# Altium PCB PowerBoard.PcbDoc (part 3 of 3)
Units mm, origin at the board's own origin, x right, y up, seen from the top; angles counter-clockwise.
Board outline 222.5 x 110 mm, 4 copper layers (Top Layer, Internal Plane 2, Internal Plane 1, Bottom Layer); 330 components, 249 nets, 1088 pads, 487 vias.
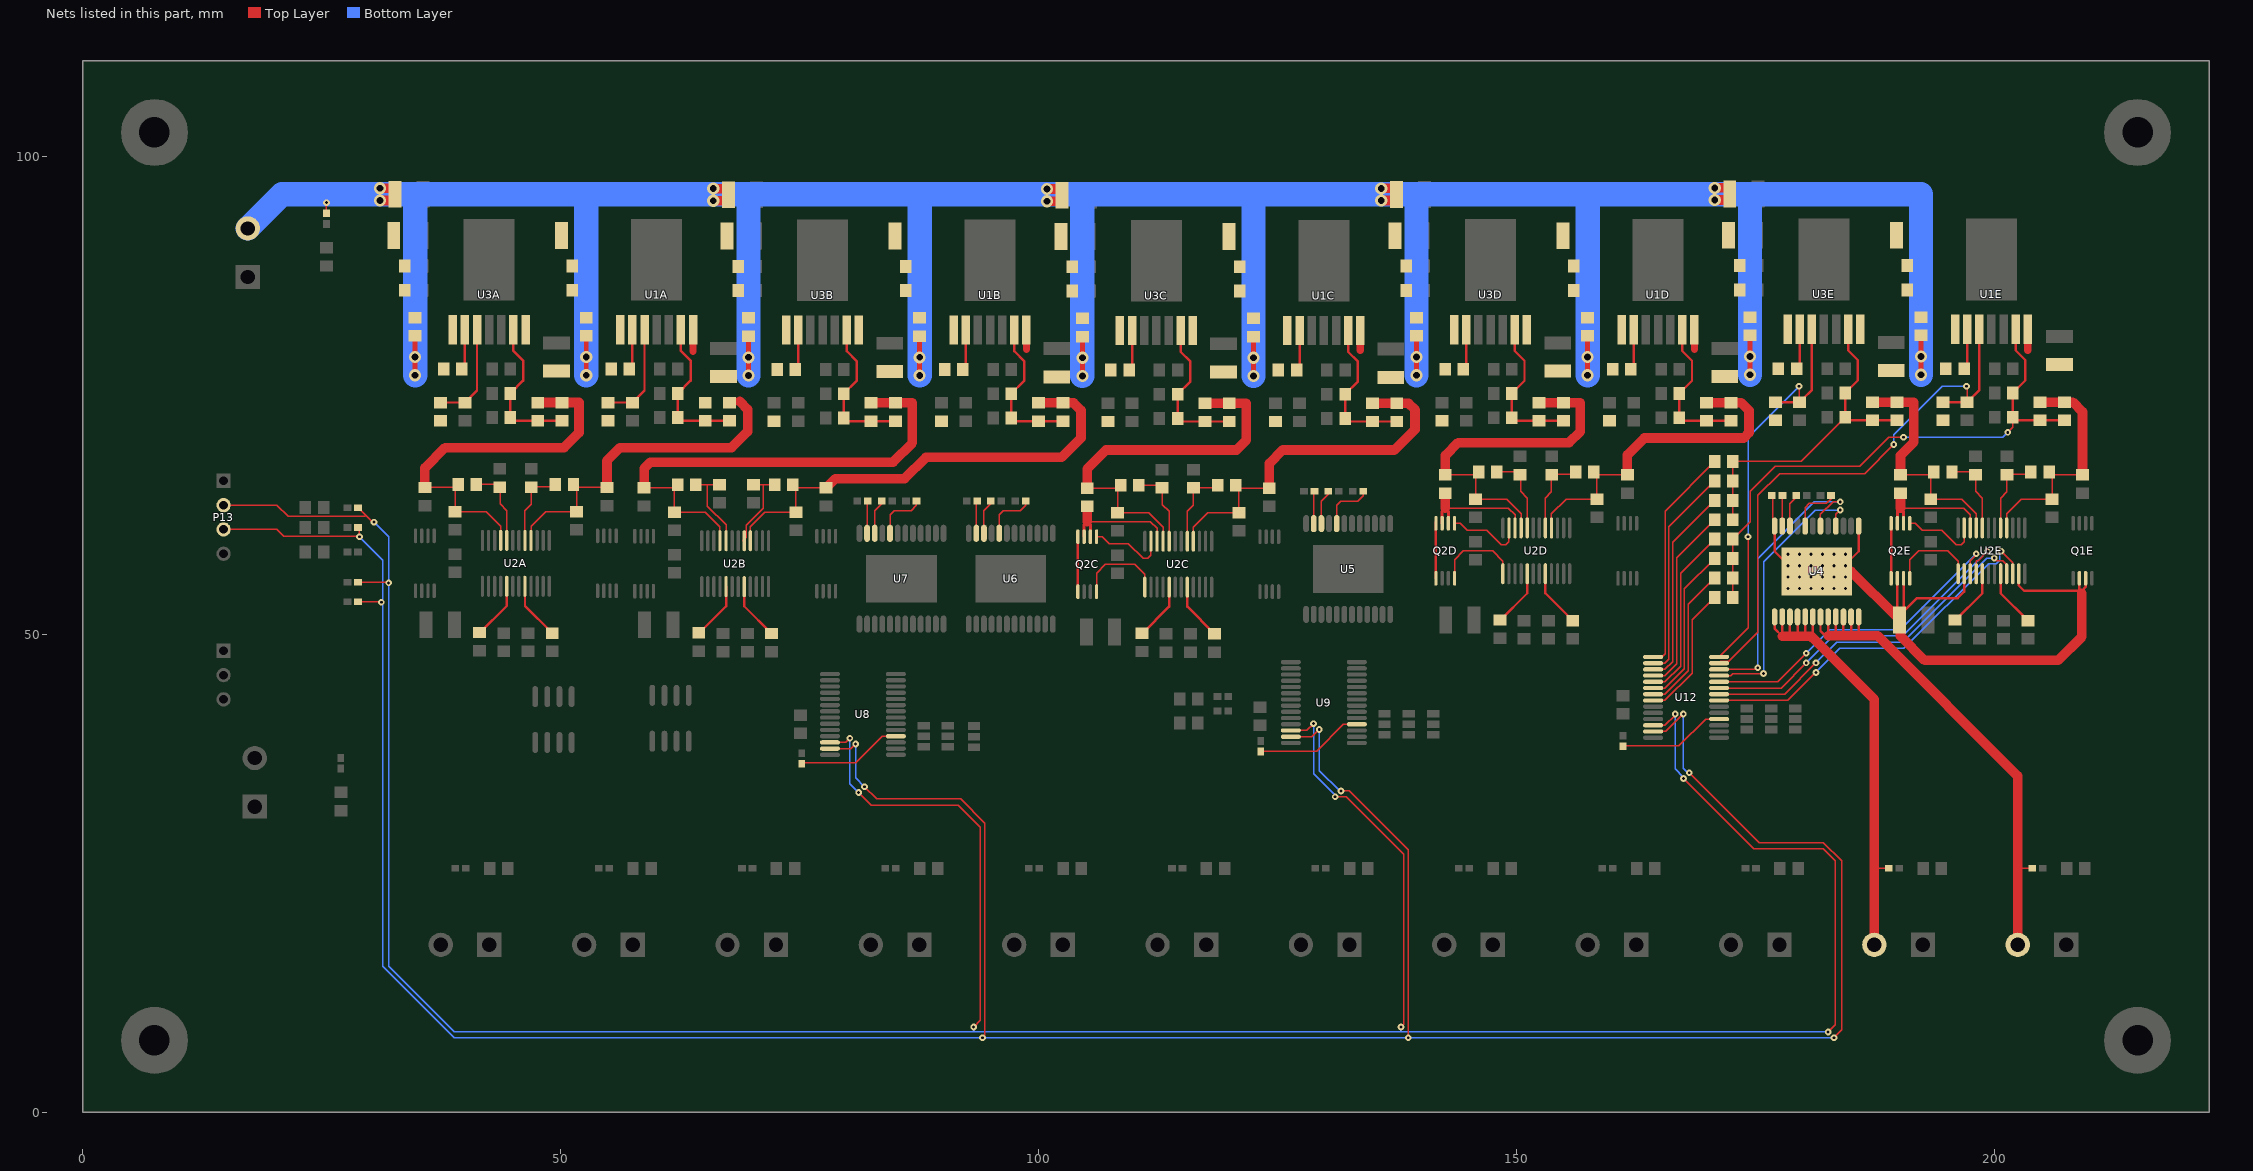
[diagram p5: the nets of this part, all layers, seen from the top]

## Via types
v1: diameter 0.7, hole 0.3, Top Layer to Bottom Layer, tented both sides, 231 vias
v2: diameter 0.7, hole 0.3, Top Layer to Bottom Layer, tented bottom, 120 vias
v3: diameter 0.66, hole 0.33, Top Layer to Bottom Layer, tented both sides, 96 vias
v4: diameter 1.27, hole 0.711, Top Layer to Bottom Layer, tented both sides, 40 vias

## Nets (pads, with @x,y where several pads share a name; then routed paths per layer and width w, separated by ;. In a path a pad name is that pad's centre, name@x,y a point inside that pad or via, vN(x,y) a via of type N, cw(c..) or ccw(c..) an arc to the next point about the centre after c; other vN are vias at no path point) (continued)
NetQ2C_D1: Q2C.D1 Q2C.D2 | length 5.9
  Top Layer w0.254: Q2C.D1@104.124,54.453 Q2C.D2@104.124,60.33
NetQ2C_G1: Q2C.G1 U2C.13 | length 9.2
  Top Layer w0.152: Q2C.G1@106.074,54.453 106.074,56.398 107.004,57.328 110.052,57.328 111.132,56.249 U2C.13@111.132,54.928
NetQ2C_G2: Q2C.G2 U2C.11 | length 8.2
  Top Layer w0.152: Q2C.G2@106.074,60.203 106.669,60.203 107.385,59.487 109.417,59.487 110.941,57.963 111.449,57.963 111.767,58.281 U2C.11@111.767,59.728
NetQ2C_S2: Q2C.S2 R12C.2 U2C.10 | length 13.9
  Top Layer w0.152: 105.099,61.773 111.703,61.773 112.402,61.075 U2C.10@112.402,59.728
  Top Layer w0.305: Q2C.S2@104.774,60.203 104.774,61.448 105.099,61.773 105.424,61.448 Q2C.S2@105.424,60.203
  Top Layer w1.016: 105.099,61.773 R12C.2@105.099,63.363
NetQ2D_D1: Q2D.D1 Q2D.D2 | length 5.9
  Top Layer w0.254: Q2D.D1@141.587,55.85 Q2D.D2@141.587,61.727
NetQ2D_G1: Q2D.G1 U2D.13 | length 9.2
  Top Layer w0.152: Q2D.G1@143.537,55.85 143.537,57.795 144.467,58.725 147.515,58.725 148.595,57.646 U2D.13@148.594,56.325
NetQ2D_G2: Q2D.G2 U2D.11 | length 8.2
  Top Layer w0.152: Q2D.G2@143.537,61.6 144.132,61.6 144.848,60.884 146.88,60.884 148.404,59.36 148.912,59.36 149.23,59.678 U2D.11@149.229,61.125
NetQ2D_S2: Q2D.S2 R12D.2 U2D.10 | length 13.9
  Top Layer w0.152: 142.562,63.17 149.166,63.17 149.864,62.471 U2D.10@149.864,61.125
  Top Layer w0.305: Q2D.S2@142.237,61.6 142.237,62.845 142.562,63.17 142.887,62.845 Q2D.S2@142.887,61.6
  Top Layer w1.016: 142.562,63.17 R12D.2@142.562,64.76
NetQ2E_D1: Q2E.D1 Q2E.D2 | length 5.9
  Top Layer w0.254: Q2E.D1@189.214,55.85 Q2E.D2@189.214,61.727
NetQ2E_G1: Q2E.G1 U2E.13 | length 9.2
  Top Layer w0.152: Q2E.G1@191.164,55.85 191.164,57.795 192.094,58.725 195.142,58.725 196.222,57.646 U2E.13@196.222,56.325
NetQ2E_G2: Q2E.G2 U2E.11 | length 8.2
  Top Layer w0.152: Q2E.G2@191.164,61.6 191.759,61.6 192.475,60.884 194.507,60.884 196.031,59.36 196.539,59.36 196.857,59.678 U2E.11@196.857,61.125
NetQ2E_S2: Q2E.S2 R12E.2 U2E.10 | length 13.9
  Top Layer w0.152: 190.189,63.17 196.793,63.17 197.492,62.472 U2E.10@197.492,61.125
  Top Layer w0.305: Q2E.S2@189.864,61.6 189.864,62.845 190.189,63.17 190.514,62.845 Q2E.S2@190.514,61.6
  Top Layer w1.016: 190.189,63.17 R12E.2@190.189,64.76
NetR2A_2: R2A.2 R3A.2 U2A.5 | length 8
  Top Layer w0.152: U2A.5@46.271,59.815 46.271,62.939 46.903,63.572 46.903,65.416 R2A.2@49.067,65.416
NetR2B_2: R2B.2 R3B.2 U2B.5 | length 9.2
  Top Layer w0.152: U2B.5@69.216,59.777 69.075,59.777 69.447,60.149 69.447,61.421 71.076,63.049 71.076,63.058 71.188,63.17 71.188,65.632 ; R3B.2@70.172,65.476 R3B.2@70.172,65.644 ; R3B.2@70.184,65.632 71.188,65.632 ; R2B.2@72.393,65.632 71.188,65.632
NetR2C_2: R2C.2 R3C.2 U2C.5 | length 8
  Top Layer w0.152: U2C.5@115.577,59.728 115.577,62.853 116.209,63.485 116.209,65.329 R2C.2@118.373,65.329
NetR2D_2: R2D.2 R3D.2 U2D.5 | length 8
  Top Layer w0.152: U2D.5@153.039,61.125 153.039,64.249 153.672,64.882 153.672,66.726 R2D.2@155.836,66.726
NetR2E_2: R2E.2 R3E.2 U2E.5 | length 8
  Top Layer w0.152: U2E.5@200.667,61.125 200.667,64.25 201.299,64.882 201.299,66.726 R2E.2@203.463,66.726
NetR4A_1: R4A.1 U1A.2 | length 4.3
  Top Layer w0.254: R4A.1@57.19,77.735 57.51,78.055 U1A.2@57.51,81.86
NetR4B_1: R4B.1 U1B.2 | length 4.3
  Top Layer w0.254: R4B.1@92.073,77.697 92.393,78.017 U1B.2@92.393,81.822
NetR4C_1: R4C.1 U1C.2 | length 4.3
  Top Layer w0.254: R4C.1@127.004,77.648 127.324,77.968 U1C.2@127.324,81.773
NetR4D_1: R4D.1 U1D.2 | length 4.3
  Top Layer w0.254: R4D.1@161.964,77.726 162.284,78.046 U1D.2@162.284,81.851
NetR4E_1: R4E.1 U1E.2 | length 4.3
  Top Layer w0.254: R4E.1@196.854,77.775 197.174,78.095 U1E.2@197.174,81.9
NetR10A_2: R10A.2 R11A.2 U2A.8 | length 8.1
  Top Layer w0.152: R11A.2@41.569,65.67 43.479,65.67 43.667,65.482 43.667,63.638 44.366,62.939 U2A.8@44.366,59.815
NetR10B_2: R10B.2 R11B.2 U2B.8 | length 9
  Top Layer w0.152: R11B.2@64.514,65.632 65.346,65.632 ; R10B.2@66.612,65.444 66.424,65.632 65.346,65.632 ; R10B.2@66.612,65.476 R10B.2@66.612,65.644 ; U2B.8@67.311,59.777 67.311,61.447 65.346,63.412 65.346,65.632
NetR10C_2: R10C.2 R11C.2 U2C.8 | length 8.1
  Top Layer w0.152: R11C.2@110.875,65.583 112.785,65.583 112.973,65.395 112.973,63.551 113.672,62.853 U2C.8@113.672,59.728
NetR10D_2: R10D.2 R11D.2 U2D.8 | length 8.1
  Top Layer w0.152: R11D.2@148.338,66.98 150.248,66.98 150.436,66.792 150.436,64.948 151.134,64.249 U2D.8@151.134,61.125
NetR10E_2: R10E.2 R11E.2 U2E.8 | length 8.1
  Top Layer w0.152: R11E.2@195.965,66.98 197.875,66.98 198.063,66.792 198.063,64.948 198.762,64.25 U2E.8@198.762,61.125
NetR13A_1: R13A.1 U3A.2 | length 4.4
  Top Layer w0.254: R13A.1@39.664,77.735 39.984,77.735 U3A.2@39.984,81.86
NetR13B_1: R13B.1 U3B.2 | length 4.4
  Top Layer w0.254: R13B.1@74.547,77.697 74.867,77.697 U3B.2@74.867,81.822
NetR13C_1: R13C.1 U3C.2 | length 4.4
  Top Layer w0.254: R13C.1@109.478,77.648 109.798,77.648 U3C.2@109.798,81.773
NetR13D_1: R13D.1 U3D.2 | length 4.4
  Top Layer w0.254: R13D.1@144.438,77.726 144.758,77.726 U3D.2@144.758,81.851
NetR13E_1: R13E.1 U3E.2 | length 4.4
  Top Layer w0.254: R13E.1@179.328,77.775 179.648,77.775 U3E.2@179.648,81.9
NetR19_2: R19.2 U4.CS_DIS | length 3.3
  Top Layer w0.152: U4.CS_DIS@177.824,61.316 R19.2@177.824,64.608
NetR20_2: R20.2 U5.CS_DIS | length 3.3
  Top Layer w0.152: U5.CS_DIS@128.802,61.57 R20.2@128.802,64.862
NetR21_1: R21.1 U4.CS2 | length 3.7
  Top Layer w0.152: U4.CS2@178.624,61.316 178.624,63.672 179.35,64.398 R21.1@179.35,64.694
NetR22_1: R22.1 U4.CS1 | length 5.6
  Top Layer w0.152: U4.CS1@180.224,61.316 180.224,63.24 180.662,63.678 182.44,63.678 182.99,64.228 R22.1@182.99,64.694
NetR23_1: R23.1 U5.CS2 | length 3.7
  Top Layer w0.152: U5.CS2@129.602,61.57 129.602,63.926 130.328,64.652 R23.1@130.328,64.948
NetR24_1: R24.1 U5.CS1 | length 5.6
  Top Layer w0.152: U5.CS1@131.202,61.57 131.202,63.494 131.64,63.932 133.418,63.932 133.968,64.482 R24.1@133.968,64.948
NetR25_2: R25.2 U6.CS_DIS | length 3.3
  Top Layer w0.152: U6.CS_DIS@93.496,60.554 R25.2@93.496,63.846
NetR26_2: R26.2 U7.CS_DIS | length 3.3
  Top Layer w0.152: U7.CS_DIS@82.066,60.554 R26.2@82.066,63.846
NetR27_1: R27.1 U6.CS2 | length 3.7
  Top Layer w0.152: U6.CS2@94.296,60.554 94.296,62.91 95.022,63.636 R27.1@95.022,63.932
NetR28_1: R28.1 U6.CS1 | length 5.6
  Top Layer w0.152: U6.CS1@95.896,60.554 95.896,62.478 96.334,62.916 98.112,62.916 98.662,63.466 R28.1@98.662,63.932
NetR29_1: R29.1 U7.CS2 | length 3.7
  Top Layer w0.152: U7.CS2@82.866,60.554 82.866,62.91 83.592,63.636 R29.1@83.592,63.932
NetR30_1: R30.1 U7.CS1 | length 5.6
  Top Layer w0.152: U7.CS1@84.466,60.554 84.466,62.478 84.904,62.916 86.682,62.916 87.232,63.466 R30.1@87.232,63.932
NetR31_2: R31.2 U8.18 | length 11.2
  Top Layer w0.152: R31.2@75.022,36.482 75.064,36.524 80.864,36.524 83.669,39.329 U8.18@85.076,39.329
NetR32_2: R32.2 U9.18 | length 11.2
  Top Layer w0.152: R32.2@123.252,37.728 123.294,37.77 129.094,37.77 131.899,40.575 U9.18@133.306,40.575
NetR35_1: R35.1 U12.7 | length 15.6
  Top Layer w0.152: U12.7@164.312,43.719 165.552,43.719 167.996,46.163 167.996,53.122 R35.1@170.754,55.88
NetR36_1: R36.1 U12.8 | length 14.2
  Top Layer w0.152: U12.8@164.312,43.069 165.552,43.069 168.402,45.919 168.402,50.52 168.402,51.496 R36.1@170.754,53.848
NetR37_1: R37.1 U12.6 | length 16.9
  Top Layer w0.152: U12.6@164.312,44.369 165.552,44.369 167.589,46.406 167.589,54.747 R37.1@170.754,57.912
NetR38_1: R38.1 U12.5 | length 18.3
  Top Layer w0.152: U12.5@164.312,45.019 165.552,45.019 167.183,46.65 167.183,56.373 R38.1@170.754,59.944
NetR39_1: R39.1 U12.4 | length 19.7
  Top Layer w0.152: U12.4@164.312,45.669 165.552,45.669 166.776,46.893 166.776,57.998 R39.1@170.754,61.976
NetR40_1: R40.1 U12.3 | length 21.1
  Top Layer w0.152: U12.3@164.312,46.319 165.552,46.319 166.37,47.137 166.37,59.624 R40.1@170.754,64.008
NetR41_1: R41.1 U12.2 | length 22.5
  Top Layer w0.152: U12.2@164.312,46.969 165.552,46.969 165.964,47.381 165.964,61.25 R41.1@170.754,66.04
NetR42_1: R42.1 U12.1 | length 23.7
  Top Layer w0.152: U12.1@164.312,47.619 165.246,47.619 165.557,47.93 165.557,62.441 165.557,62.875 R42.1@170.754,68.072
NetR43_2: R43.2 U12.18 | length 11.2
  Top Layer w0.152: R43.2@161.158,38.272 161.2,38.314 167,38.314 169.805,41.119 U12.18@171.212,41.119
NetR44A_1: R44A.1 U2A.20 | length 6.1
  Top Layer w0.254: U2A.20@46.271,55.015 46.271,52.968 R44A.1@49.128,50.11
NetR44B_1: R44B.1 U2B.20 | length 6.1
  Top Layer w0.254: U2B.20@69.216,54.977 69.216,52.93 R44B.1@72.073,50.072
NetR44C_1: R44C.1 U2C.20 | length 6.1
  Top Layer w0.254: U2C.20@115.577,54.928 115.577,52.881 R44C.1@118.434,50.023
NetR44D_1: R44D.1 U2D.20 | length 6.1
  Top Layer w0.254: U2D.20@153.039,56.325 153.04,54.278 R44D.1@155.897,51.42
NetR44E_1: R44E.1 U2E.20 | length 6.1
  Top Layer w0.254: U2E.20@200.667,56.325 200.667,54.278 R44E.1@203.524,51.42
NetR45A_1: R45A.1 U2A.17 | length 6.1
  Top Layer w0.254: R45A.1@41.508,50.11 44.366,52.968 U2A.17@44.366,55.015
NetR45B_1: R45B.1 U2B.17 | length 6.1
  Top Layer w0.254: R45B.1@64.453,50.072 67.311,52.93 U2B.17@67.311,54.977
NetR45C_1: R45C.1 U2C.17 | length 6.1
  Top Layer w0.254: R45C.1@110.814,50.023 113.672,52.881 U2C.17@113.672,54.928
NetR45D_1: R45D.1 U2D.17 | length 6.1
  Top Layer w0.254: R45D.1@148.277,51.42 151.134,54.277 U2D.17@151.134,56.325
NetR45E_1: R45E.1 U2E.17 | length 6.1
  Top Layer w0.254: R45E.1@195.904,51.42 198.762,54.278 U2E.17@198.762,56.325
PWR_SCL: P13.2 R62.2 R64.1 U8.12 U9.12 U12.12 | length 353.2
  Top Layer w0.152: P13.2@14.732,63.5 20.32,63.5 21.482,62.338 29.576,62.338 ; R62.2@28.795,55.423 31.953,55.423 v1(32.004,55.372) ; R64.1@28.8,63.242 v1@30.48,61.562 ; U8.12@78.176,38.679 79.827,38.679 v1(80.264,39.116) ; v1(81.185,33.433) 82.503,32.116 91.582,32.116 93.924,29.774 93.924,9.596 v1(93.218,8.89) ; U9.12@126.406,39.925 128.063,39.925 v1(128.778,40.64) ; v1(131.041,32.997) 132.2,32.997 138.224,26.972 138.224,9.192 v1(137.922,8.89) ; U12.12@164.312,40.469 165.552,40.469 166.624,41.541 v1(166.624,41.656) ; v1(167.49,34.902) 174.848,27.544 182.118,27.544 183.388,26.274 183.388,9.144 v1(182.626,8.382)
  Bottom Layer w0.152: v1@30.607,61.849 30.607,61.595 32.004,60.198 32.004,15.24 38.862,8.382 93.218,8.382 ; v1(80.264,39.116) 80.264,34.355 v1(81.185,33.433) ; v1(93.218,8.89) 93.218,8.382 ; v1(128.778,40.64) 128.778,35.403 131.041,33.14 v1(131.041,32.997) ; v1(137.922,8.89) 137.922,8.382 ; v1(166.624,41.656) 166.624,35.911 167.49,35.045 v1(167.49,34.902) ; v1(182.626,8.382) 137.922,8.382 ; 93.218,8.382 137.922,8.382
  other v1: 30.48,61.722
PWR_SDA: P13.3 R61.2 R63.1 U8.13 U9.13 U12.13 | length 352.4
  Top Layer w0.152: P13.3@14.732,60.96 20.32,60.96 21.055,60.225 28.956,60.225 28.956,61.014 R63.1@28.8,61.17 ; R61.2@28.795,53.391 31.191,53.391 v1(31.242,53.34) ; U8.13@78.176,38.029 80.382,38.029 v1(80.867,38.513) ; v1(81.788,34.036) 83.058,32.766 91.851,32.766 94.384,30.234 94.384,8.024 v1(94.139,7.779) ; U9.13@126.406,39.275 128.618,39.275 v1(129.381,40.037) ; v1(131.644,33.6) 132.516,33.6 138.684,27.432 v1(138.684,7.779) ; U12.13@164.312,39.819 165.639,39.819 v1(167.476,41.656) ; v1(168.093,35.505) 175.403,28.194 182.118,28.194 184.038,26.274 184.038,8.589 v1(183.229,7.779)
  Bottom Layer w0.152: v1(28.956,60.198) 31.401,57.753 31.401,15.24 38.862,7.779 v1(94.139,7.779) v1(183.229,7.779) ; v1(80.867,38.513) 80.867,34.957 v1(81.788,34.036) ; v1(129.381,40.037) 129.381,35.719 131.5,33.6 v1(131.644,33.6) ; v1(167.476,41.656) 167.476,35.978 167.949,35.505 v1(168.093,35.505)
REG1_ENA: R6A.2 R9A.1 U1A.3 | length 10.7
  Top Layer w0.254: R6A.2@54.97,74.24 R9A.1@57.51,74.24 58.78,75.51 U1A.3@58.78,81.86
REG1_ENE: R6E.2 R9E.1 U1E.3 U12.27 | length 59.3
  Top Layer w0.152: U12.27@171.212,46.969 171.409,47.165 172.225,47.165 175.26,50.2 175.26,64.516 177.546,66.802 186.436,66.802 v1(189.484,69.85) ; v1(197.104,75.946) 197.174,75.876 R9E.1@197.174,74.28
  Top Layer w0.254: R6E.2@194.634,74.28 R9E.1@197.174,74.28 198.444,75.55 U1E.3@198.444,81.9
  Bottom Layer w0.152: v1(189.484,69.85) 189.484,70.866 194.564,75.946 v1(197.104,75.946)
REG1_FBA: C5A.1 R5A.1 R7A.2 R8A.2 U1A.6 | length 15.7
  Top Layer w0.254: U1A.6@62.59,81.86 62.59,79.64 63.606,78.624 63.606,76.531 R7A.2@62.27,75.195 R8A.2@62.27,72.655 62.585,72.34 R5A.1@65.13,72.34 C5A.1@67.67,72.34
REG1_FBB: C5B.1 R5B.1 R7B.2 R8B.2 U1B.6 | length 15.7
  Top Layer w0.254: U1B.6@97.473,81.822 97.473,79.602 98.489,78.586 98.489,76.493 R7B.2@97.153,75.157 R8B.2@97.153,72.617 97.468,72.302 R5B.1@100.013,72.302 C5B.1@102.553,72.302
REG1_FBC: C5C.1 R5C.1 R7C.2 R8C.2 U1C.6 | length 15.7
  Top Layer w0.254: U1C.6@132.404,81.773 132.404,79.553 133.42,78.537 133.42,76.444 R7C.2@132.084,75.108 R8C.2@132.084,72.568 132.399,72.253 R5C.1@134.944,72.253 C5C.1@137.484,72.253
REG1_FBD: C5D.1 R5D.1 R7D.2 R8D.2 U1D.6 | length 15.7
  Top Layer w0.254: U1D.6@167.364,81.851 167.364,79.631 168.38,78.615 168.38,76.522 R7D.2@167.044,75.186 R8D.2@167.044,72.646 167.359,72.331 R5D.1@169.904,72.331 C5D.1@172.444,72.331
REG1_FBE: C5E.1 R5E.1 R7E.2 R8E.2 R35.2 R36.2 R37.2 R38.2 U1E.6 | length 58.8
  Top Layer w0.152: R36.2@172.654,53.848 R35.2@172.654,55.88 R37.2@172.654,57.912 R38.2@172.654,59.944 174.498,61.788 174.498,64.947 177.115,67.564 185.928,67.564 188.976,70.612 v1(190.5,70.612) ; v1(201.422,71.12) 201.934,71.632 R8E.2@201.934,72.695
  Top Layer w0.254: U1E.6@202.254,81.9 202.254,79.68 203.27,78.664 203.27,76.571 R7E.2@201.934,75.235 R8E.2@201.934,72.695 202.249,72.38 C5E.1@207.334,72.38
  Bottom Layer w0.152: v1(190.5,70.612) 200.914,70.612 v1(201.422,71.12)
REG2_ENA: R15A.2 R18A.1 U3A.3 | length 10.2
  Top Layer w0.254: R15A.2@37.444,74.24 R18A.1@39.984,74.24 ; R18A.1@40.301,74.557 41.254,75.51 U3A.3@41.254,81.86
REG2_ENE: R15E.2 R18E.1 U3E.3 U12.28 | length 44.2
  Top Layer w0.152: U12.28@171.212,47.619 174.244,50.651 v1(174.244,60.198) ; v1(179.578,75.946) 179.578,74.35 R18E.1@179.648,74.28
  Top Layer w0.254: R15E.2@177.108,74.28 R18E.1@179.648,74.28 179.966,74.597 180.918,75.55 U3E.3@180.918,81.9
  Bottom Layer w0.152: v1(174.244,60.198) 174.244,70.612 v1(179.578,75.946)
REG2_FBA: C14A.1 R14A.1 R16A.2 R17A.2 U3A.6 | length 15.7
  Top Layer w0.254: U3A.6@45.064,81.86 45.064,79.64 46.08,78.624 46.08,76.531 R17A.2@44.744,75.195 R16A.2@44.744,72.655 45.059,72.34 R14A.1@47.604,72.34 C14A.1@50.144,72.34
REG2_FBB: C14B.1 R14B.1 R16B.2 R17B.2 U3B.6 | length 15.7
  Top Layer w0.254: U3B.6@79.947,81.822 79.947,79.602 80.963,78.586 80.963,76.493 R17B.2@79.627,75.157 R16B.2@79.627,72.617 79.942,72.302 R14B.1@82.487,72.302 C14B.1@85.027,72.302
REG2_FBC: C14C.1 R14C.1 R16C.2 R17C.2 U3C.6 | length 15.7
  Top Layer w0.254: U3C.6@114.878,81.773 114.878,79.553 115.894,78.537 115.894,76.444 R17C.2@114.558,75.108 R16C.2@114.558,72.568 114.873,72.253 R14C.1@117.418,72.253 C14C.1@119.958,72.253
REG2_FBD: C14D.1 R14D.1 R16D.2 R17D.2 U3D.6 | length 15.7
  Top Layer w0.254: U3D.6@149.838,81.851 149.838,79.631 150.854,78.615 150.854,76.522 R17D.2@149.518,75.186 R16D.2@149.518,72.646 149.833,72.331 R14D.1@152.378,72.331 C14D.1@154.918,72.331
REG2_FBE: C14E.1 R14E.1 R16E.2 R17E.2 R39.2 R40.2 R41.2 R42.2 U3E.6 | length 35.5
  Top Layer w0.152: R39.2@172.654,61.976 R40.2@172.654,64.008 R41.2@172.654,66.04 R42.2@172.654,68.072 179.785,68.072 R16E.2@184.408,72.695
  Top Layer w0.254: U3E.6@184.728,81.9 184.728,79.68 185.744,78.664 185.744,76.571 R17E.2@184.408,75.235 R16E.2@184.408,72.695 184.723,72.38 C14E.1@189.808,72.38
VBATT: C13A.1 C13B.1 C13C.1 C13D.1 C13E.1 FB1A.2 FB1B.2 FB1C.2 FB1D.2 FB1E.2 FB2A.2 FB2B.2 FB2C.2 FB2D.2 FB2E.2 P6.2 R46.1 | length 418.2
  Top Layer w0.152: R46.1@25.5,94.026 v1(25.5,95.15)
  Top Layer w0.508: v4(34.777,77.1) v4(34.777,79.005) FB2A.2@34.777,81.23 ; v4(52.684,77.1) v4(52.684,79.005) FB1A.2@52.684,81.23 ; v4(69.66,77.062) v4(69.66,78.967) FB2B.2@69.66,81.192 ; v4(87.567,77.062) v4(87.567,78.967) FB1B.2@87.567,81.192 ; v4(104.591,77.013) v4(104.591,78.918) FB2C.2@104.591,81.143 ; v4(122.498,77.013) v4(122.498,78.918) FB1C.2@122.498,81.143 ; v4(139.551,77.091) v4(139.551,78.996) FB2D.2@139.551,81.221 ; v4(157.458,77.091) v4(157.458,78.996) FB1D.2@157.458,81.221 ; v4(174.441,77.14) v4(174.441,79.045) FB2E.2@174.441,81.27 ; v4(192.348,77.14) v4(192.348,79.045) FB1E.2@192.348,81.27
  Top Layer w1.016: v4(31.092,95.388) C13A.1@32.032,95.388 ; v4(31.092,96.658) C13A.1@32.032,96.658 ; v4(65.975,95.35) C13B.1@66.915,95.35 ; v4(65.975,96.62) C13B.1@66.915,96.62 ; v4(100.906,95.301) C13C.1@101.846,95.301 ; v4(100.906,96.571) C13C.1@101.846,96.571 ; v4(135.866,95.379) C13D.1@136.806,95.379 ; v4(135.866,96.649) C13D.1@136.806,96.649 ; v4(170.756,95.428) C13E.1@171.696,95.428 ; v4(170.756,96.698) C13E.1@171.696,96.698
  Bottom Layer w0.152: v4(31.092,95.388) 31.092,96.023 v4(31.092,96.658)
  Bottom Layer w2.54: P6.2@17.272,92.456 20.839,96.023 31.092,96.023 174.441,96.023 ; v4(34.777,77.1) v4(34.777,79.005) 34.777,96.002 ; v4(52.684,77.1) v4(52.684,79.005) 52.684,95.875 ; v4(69.66,77.062) v4(69.66,78.967) 69.66,95.959 ; v4(87.567,77.062) v4(87.567,78.967) 87.567,95.96 ; v4(104.591,77.013) v4(104.591,78.918) 104.591,95.966 ; v4(122.498,77.013) v4(122.498,78.918) 122.498,95.839 ; v4(139.551,77.091) v4(139.551,78.996) 139.551,95.918 ; v4(157.458,77.091) v4(157.458,78.996) 157.458,95.791 ; v4(174.441,77.14) v4(174.441,79.045) 174.441,96.023 ; v4(192.348,77.14) v4(192.348,79.045) 192.348,96.023 174.441,96.023
VIN1_BYPASSEDA: C7A.2 C8A.2 C9A.1 FB1A.1 R4A.2 R6A.1 U1A.1
VIN1_BYPASSEDB: C7B.2 C8B.2 C9B.1 FB1B.1 R4B.2 R6B.1 U1B.1
VIN1_BYPASSEDC: C7C.2 C8C.2 C9C.1 FB1C.1 R4C.2 R6C.1 U1C.1
VIN1_BYPASSEDD: C7D.2 C8D.2 C9D.1 FB1D.1 R4D.2 R6D.1 U1D.1
VIN1_BYPASSEDE: C7E.2 C8E.2 C9E.1 FB1E.1 R4E.2 R6E.1 U1E.1
VIN2_BYPASSEDA: C15A.2 C16A.2 C17A.1 FB2A.1 R13A.2 R15A.1 U3A.1
VIN2_BYPASSEDB: C15B.2 C16B.2 C17B.1 FB2B.1 R13B.2 R15B.1 U3B.1
VIN2_BYPASSEDC: C15C.2 C16C.2 C17C.1 FB2C.1 R13C.2 R15C.1 U3C.1
VIN2_BYPASSEDD: C15D.2 C16D.2 C17D.1 FB2D.1 R13D.2 R15D.1 U3D.1
VIN2_BYPASSEDE: C15E.2 C16E.2 C17E.1 FB2E.1 R13E.2 R15E.1 U3E.1
VOUTE: C1E.2 Q1E.S2 Q2E.S1 R19.1 U2E.14 U2E.23 U4.VCC | length 83.5
  Top Layer w0.152: R19.1@176.81,64.694 176.81,61.53 U4.VCC@177.024,61.316
  Top Layer w0.254: U4.VCC@177.024,61.316 177.024,58.68 179.138,56.566 U4.VCC@181.424,56.566 183.71,56.566 185.824,58.68 U4.VCC@185.824,61.316 ; Q2E.S1@189.864,55.85 189.864,51.731 C1E.2@190.514,52.381 ; Q2E.S1@190.514,55.85 C1E.2@190.514,52.381 ; U2E.14@196.857,56.325 196.857,54.439 196.19,53.772 191.905,53.772 C1E.2@190.514,52.381 ; U2E.23@202.572,56.325 202.572,55.106 203.143,54.534 208.985,54.534 ; Q1E.S2@208.914,55.85 208.914,54.605 208.985,54.534 ; Q1E.S2@209.564,55.85 209.564,54.939 209.159,54.534 208.985,54.534
  Top Layer w1.016: U4.VCC@183.71,56.566 185.029,56.566 189.864,51.731 C1E.2@190.109,51.486 190.189,51.406 190.189,49.809 192.729,47.269 206.699,47.269 209.159,49.729 209.159,54.254
  other v3: 178.424,54.766 179.624,54.766 180.824,54.766 182.024,54.766 183.224,54.766 184.424,54.766 178.424,55.966 179.624,55.966 180.824,55.966 182.024,55.966 183.224,55.966 184.424,55.966 178.424,57.166 179.624,57.166 180.824,57.166 182.024,57.166 183.224,57.166 184.424,57.166 178.424,58.366 179.624,58.366 180.824,58.366 182.024,58.366 183.224,58.366 184.424,58.366
VREG1A: C2A.1 C5A.2 C11A.2 R1A.1 R2A.1 R5A.2 U1A.7 U2A.4 | length 37.1
  Top Layer w0.152: U2A.4@46.906,59.815 46.906,61.288 48.427,62.81 C2A.1@51.668,62.81 51.668,65.35 R1A.1@54.843,65.35
  Top Layer w0.762: 63.86,79.608 U1A.7@63.86,81.86
  Top Layer w1.016: R1A.1@54.843,65.35 54.843,68.161 56.202,69.52 67.886,69.52 69.575,71.209 69.575,73.525 68.75,74.35
VREG1B: C2B.1 C5B.2 C11B.2 R1B.1 R2B.1 R5B.2 U1B.7 U2B.4 | length 51.1
  Top Layer w0.152: U2B.4@69.851,59.777 69.851,61.251 71.372,62.772 C2B.1@74.613,62.772 74.613,65.312 R1B.1@77.788,65.312
  Top Layer w0.762: 98.743,79.819 U1B.7@98.743,81.822
  Top Layer w1.016: R1B.1@77.788,65.312 78.745,66.269 85.971,66.269 88.206,68.504 102.426,68.504 104.458,70.536 104.458,73.417 103.673,74.202 C5B.2@102.553,74.202 R5B.2@100.013,74.202
VREG1C: C2C.1 C5C.2 C11C.2 R1C.1 R2C.1 R5C.2 U1C.7 U2C.4 | length 40.8
  Top Layer w0.152: U2C.4@116.212,59.728 116.212,61.202 117.733,62.723 C2C.1@120.974,62.723 120.974,65.263 R1C.1@124.149,65.263
  Top Layer w0.762: 133.674,79.686 U1C.7@133.674,81.773
  Top Layer w1.016: R1C.1@124.149,65.263 124.149,67.871 125.544,69.266 137.228,69.266 139.389,71.427 139.389,73.486 138.722,74.153 C5C.2@137.484,74.153 R5C.2@134.944,74.153
VREG1D: C2D.1 C5D.2 C11D.2 R1D.1 R2D.1 R5D.2 U1D.7 U2D.4 | length 37.6
  Top Layer w0.152: U2D.4@153.674,61.125 153.674,62.598 155.196,64.12 C2D.1@158.437,64.12 158.437,66.66 R1D.1@161.612,66.66
  Top Layer w0.762: 168.634,79.778 U1D.7@168.634,81.851
  Top Layer w1.016: R1D.1@161.612,66.66 161.612,68.758 163.39,70.536 173.804,70.536 174.349,71.081 174.349,73.401 173.519,74.231 C5D.2@172.444,74.231 R5D.2@169.904,74.231
VREG1E: C2E.1 C5E.2 C11E.2 R1E.1 R2E.1 R5E.2 U1E.7 U2E.4 | length 26.3
  Top Layer w0.152: U2E.4@201.302,61.125 201.302,62.599 202.823,64.12 C2E.1@206.064,64.12 206.064,66.66 R1E.1@209.239,66.66
  Top Layer w0.762: 203.524,79.686 U1E.7@203.524,81.9
  Top Layer w1.016: R5E.2@204.794,74.28 C5E.2@207.334,74.28 208.22,74.28 209.239,73.261 R1E.1@209.239,66.66
VREG2A: C12A.2 C14A.2 C19A.2 R11A.1 R12A.1 R14A.2 U2A.9 U3A.7 | length 41.2
  Top Layer w0.152: R12A.1@35.793,65.35 R11A.1@38.968,65.35 ; R11A.1@39.349,65.35 R11A.1@38.968,65.35 ; R11A.1@39.669,65.67 R11A.1@39.288,65.67 38.968,65.67 R11A.1@38.968,65.35 ; U2A.9@43.731,59.815 43.731,61.288 42.209,62.81 C12A.2@38.968,62.81 R11A.1@38.968,65.35
  Top Layer w1.016: R12A.1@35.793,65.35 35.793,67.387 37.926,69.52 50.36,69.52 51.922,71.082 51.922,74.24 C14A.2@50.144,74.24 R14A.2@47.604,74.24
VREG2B: C12B.2 C14B.2 C19B.2 R11B.1 R12B.1 R14B.2 U2B.9 U3B.7 | length 53.7
  Top Layer w0.152: R12B.1@58.738,65.312 R11B.1@61.913,65.312 ; R11B.1@62.294,65.312 R11B.1@61.913,65.312 ; R11B.1@62.614,65.632 61.913,65.632 R11B.1@61.913,65.312 ; U2B.9@66.676,59.777 66.676,61.251 65.154,62.772 C12B.2@61.913,62.772 R11B.1@61.913,65.312
  Top Layer w1.016: R12B.1@58.738,65.312 58.738,67.349 59.385,67.996 84.785,67.996 86.805,70.016 86.805,74.202 R14B.2@82.487,74.202
VREG2C: C12C.2 C14C.2 C19C.2 R11C.1 R12C.1 R14C.2 U2C.9 U3C.7 | length 42.1
  Top Layer w0.152: R12C.1@105.099,65.263 R11C.1@108.274,65.263 ; R11C.1@108.655,65.263 R11C.1@108.274,65.263 ; R11C.1@108.975,65.583 108.274,65.583 R11C.1@108.274,65.263 ; U2C.9@113.037,59.728 113.037,61.202 111.515,62.723 C12C.2@108.274,62.723 R11C.1@108.274,65.263
  Top Layer w1.016: R12C.1@105.099,65.263 105.099,67.3 107.065,69.266 120.718,69.266 121.736,70.284 121.736,74.153 R14C.2@117.418,74.153
VREG2D: C12D.2 C14D.2 C19D.2 R11D.1 R12D.1 R14D.2 U2D.9 U3D.7 | length 38.5
  Top Layer w0.152: R12D.1@142.562,66.66 R11D.1@145.737,66.66 ; R11D.1@146.118,66.66 R11D.1@145.737,66.66 ; R11D.1@146.438,66.98 145.737,66.98 R11D.1@145.737,66.66 ; U2D.9@150.499,61.125 150.499,62.598 148.978,64.12 C12D.2@145.737,64.12 R11D.1@145.737,66.66
  Top Layer w1.016: R12D.1@142.562,66.66 142.562,68.697 143.91,70.045 155.533,70.045 156.696,71.208 156.696,74.231 R14D.2@152.378,74.231
VREG2E: C12E.2 C14E.2 C19E.2 R11E.1 R12E.1 R14E.2 U2E.9 U3E.7 | length 26.5
  Top Layer w0.152: R12E.1@190.189,66.66 R11E.1@193.364,66.66 ; R11E.1@193.745,66.66 R11E.1@193.364,66.66 ; R11E.1@194.065,66.98 R11E.1@193.684,66.98 193.364,66.98 R11E.1@193.364,66.66 ; U2E.9@198.127,61.125 198.127,62.599 196.605,64.12 C12E.2@193.364,64.12 R11E.1@193.364,66.66
  Top Layer w1.016: R14E.2@187.268,74.28 C14E.2@189.808,74.28 191.586,74.28 191.586,70.094 190.189,68.697 R12E.1@190.189,66.66
VVAR_FAULT1: U2E.21 U12.22 | length 37.2
  Top Layer w0.152: U12.22@171.212,43.719 178.063,43.719 v1(181.345,47.001) ; v1(199.998,57.963) 200.264,57.698 200.874,57.698 201.302,57.27 U2E.21@201.302,56.325
  Bottom Layer w0.152: v1(181.345,47.001) 183.508,49.164 190.413,49.164 199.213,57.963 v1(199.998,57.963)
VVAR_FAULT2: U2E.16 U12.23 | length 36.9
  Top Layer w0.152: U12.23@171.212,44.369 177.708,44.369 v1(180.34,47.001) ; U2E.16@198.127,56.325 198.127,57.698 198.312,57.698 v1(199.288,58.674)
  Bottom Layer w0.152: v1(180.34,47.001) 183.153,49.814 190.428,49.814 v1(199.288,58.674)
VVAR_PWRGD1: U2E.22 U12.21 | length 39.4
  Top Layer w0.152: U12.21@171.212,43.069 178.417,43.069 v1(181.345,45.996) ; v1(200.709,58.674) 200.757,58.674 201.937,57.494 U2E.22@201.937,56.325
  Bottom Layer w0.152: v1(181.345,45.996) 183.862,48.514 190.538,48.514 199.409,57.385 200.238,57.385 200.577,57.724 200.577,58.427 200.519,58.484 v1(200.709,58.674)
VVAR_PWRGD2: U2E.15 U12.24 | length 34.8
  Top Layer w0.152: U12.24@171.212,45.019 177.353,45.019 v1(180.34,48.006) ; U2E.15@197.492,56.325 197.492,57.698 198.12,58.326 v1(198.12,58.42)
  Bottom Layer w0.152: v1(180.34,48.006) 182.798,50.464 190.164,50.464 v1(198.12,58.42)
VVAR_TX1: P1.2 R47.1 U4.OUT1 | length 52.1
  Top Layer w0.152: 187.614,25.5 R47.1@188.974,25.5
  Top Layer w0.254: U4.OUT1@177.024,51.816 177.024,50.584 177.824,49.784 U4.OUT1@177.824,51.816 ; 178.624,49.784 U4.OUT1@178.624,51.816 ; 179.424,49.784 U4.OUT1@179.424,51.816 ; 180.224,49.784 U4.OUT1@180.224,51.816 ; 181.024,49.608 U4.OUT1@181.024,51.816
  Top Layer w1.016: 177.824,49.784 178.624,49.784 179.424,49.784 180.224,49.784 180.848,49.784 181.024,49.608 187.46,43.172 P1.2@187.46,17.5
VVAR_TX1_EN: U4.IN1 U12.26 | length 30.5
  Top Layer w0.152: U12.26@171.212,46.319 175.097,46.319 v1(175.26,46.482) ; U4.IN1@181.824,61.316 181.824,62.524 183.144,63.844 v1(183.896,63.844)
  Bottom Layer w0.152: v1(175.26,46.482) 175.26,57.912 181.192,63.844 v1(183.896,63.844)
VVAR_TX2: P5.2 R48.1 U4.OUT2 | length 57.6
  Top Layer w0.152: 202.46,25.346 202.614,25.5 R48.1@203.974,25.5
  Top Layer w0.254: U4.OUT2@181.824,51.816 181.824,50.332 182.332,49.824 182.624,49.824 U4.OUT2@182.624,51.816 ; 183.424,49.824 U4.OUT2@183.424,51.816 ; 184.224,49.824 U4.OUT2@184.224,51.816 ; 185.024,49.824 U4.OUT2@185.024,51.816 ; 185.824,49.824 U4.OUT2@185.824,51.816
  Top Layer w1.016: 182.624,49.824 183.424,49.824 184.224,49.824 185.024,49.824 185.824,49.824 187.816,49.824 202.46,35.18 202.46,25.346 P5.2@202.46,17.5
VVAR_TX2_EN: U4.IN2 U12.25 | length 28.6
  Top Layer w0.152: U12.25@171.212,45.669 172.41,45.669 172.62,45.879 v1(175.863,45.879) ; U4.IN2@183.424,61.316 183.424,62.524 183.892,62.992 v1(183.896,62.992)
  Bottom Layer w0.152: v1(175.863,45.879) 175.863,57.596 181.259,62.992 v1(183.896,62.992)
pads on no net: U4.3 U4.5 U4.7 U4.9 U5.3 U5.5 U5.7 U5.9 U6.3 U6.5 U6.7 U6.9 U7.3 U7.5 U7.7 U7.9 U8.11 U8.14 U8.19 U8.20 U9.11 U9.14 U9.19 U9.20 U12.11 U12.14 U12.19 U12.20

## Polygon pours and split planes (outlines as drawn)
VREG1E on Top Layer "Top Solder-No Net" (solid, remove dead copper, pour order 31): 203.016,83.49 203.016,79.045 203.651,78.41 203.651,76.825 203.651,73.33 208.731,73.33 209.745,73.33 209.745,78.41 204.921,78.41 204.286,79.045 204.286,83.49
VREG1D on Top Layer "Top Solder-No Net" (solid, remove dead copper, pour order 32): 168.126,83.441 168.126,78.996 168.761,78.361 168.761,76.776 168.761,73.281 173.841,73.281 174.855,73.281 174.855,78.361 170.031,78.361 169.396,78.996 169.396,83.441
VREG2D on Top Layer "Top Layer-No Net" (solid, remove dead copper, pour order 41): 156.574,73.093 149.838,73.093 149.584,72.839 149.076,73.347 149.076,82.999 152.378,82.999 152.378,79.189 157.204,79.189 157.204,73.093
GND on Top Layer "Top Layer-No Net" (solid, remove dead copper, pour order 48): 69.956,79.387 65.13,79.387 64.876,79.132 35.158,79.132 35.158,89.837 31.856,93.151 31.856,97.994 69.956,97.994
VIN2_BYPASSEDC on Top Layer "Top Layer-No Net" (solid, remove dead copper, pour order 35): 108.528,70.475 108.528,79.365 109.544,80.381 109.544,83.429 106.242,83.429 104.21,85.461 104.21,93.269 101.416,93.269 101.416,82.855 104.718,79.619 104.718,70.475
VREG1C on Top Layer "Top Solder-No Net" (solid, remove dead copper, pour order 29): 133.116,83.479 133.116,79.034 133.751,78.399 133.751,76.814 133.751,73.319 138.831,73.319 139.466,73.329 139.466,78.399 135.021,78.399 134.386,79.034 134.386,83.479
VREG2B on Top Layer "Top Layer-No Net" (solid, remove dead copper, pour order 39): 86.683,73.064 79.947,73.064 79.693,72.81 79.185,73.318 79.185,82.97 82.487,82.97 82.487,79.16 87.313,79.16 87.313,73.064
VIN2_BYPASSEDD on Top Layer "Top Layer-No Net" (solid, remove dead copper, pour order 36): 143.488,70.553 143.488,79.443 144.504,80.459 144.504,83.507 141.202,83.507 139.17,85.539 139.17,93.347 136.376,93.347 136.376,82.933 139.678,79.697 139.678,70.553
VREG1B on Top Layer "Top Solder-No Net" (solid, remove dead copper, pour order 28): 98.108,83.412 98.108,78.967 98.743,78.332 98.743,76.747 98.743,73.252 103.823,73.252 104.458,73.262 104.458,78.332 100.013,78.332 99.378,78.967 99.378,83.412
VIN1_BYPASSEDD on Top Layer "Top Layer-No Net" (solid, remove dead copper, pour order 46): 157.204,70.487 161.014,70.487 161.014,79.631 161.776,80.393 161.776,83.695 161.522,83.695 160.252,84.965 157.204,84.965 157.204,93.601 153.14,93.601 153.14,84.965 155.934,82.171 157.458,80.647 157.458,80.139
GND on Top Layer "Top Layer-No Net" (solid, remove dead copper, pour order 49): 104.887,79.338 100.061,79.338 99.807,79.083 70.089,79.083 70.089,89.788 66.787,93.102 66.787,97.945 104.887,97.945
VREG1A on Top Layer "Top Solder-No Net" (solid, remove dead copper, pour order 27): 63.225,83.45 63.225,79.005 63.86,78.37 63.86,76.785 63.86,73.29 68.94,73.29 69.575,73.3 69.575,78.37 65.13,78.37 64.495,79.005 64.495,83.45
VREG2E on Top Layer "Top Layer-No Net" (solid, remove dead copper, pour order 42): 191.464,73.142 184.728,73.142 184.474,72.888 183.966,73.396 183.966,83.048 187.268,83.048 187.268,79.238 192.094,79.238 192.094,73.142
VREG2C on Top Layer "Top Layer-No Net" (solid, remove dead copper, pour order 40): 121.614,73.015 114.878,73.015 114.624,72.761 114.116,73.269 114.116,82.921 117.418,82.921 117.418,79.111 122.244,79.111 122.244,73.015
GND on Top Layer "Top Layer-No Net" (solid, remove dead copper, pour order 51): 209.62,79.427 204.794,79.427 204.54,79.172 174.822,79.172 174.822,89.877 171.52,93.191 171.52,98.034 209.62,98.034
VREG2A on Top Layer "Top Layer-No Net" (solid, remove dead copper, pour order 38): 51.8,73.102 45.064,73.102 44.81,72.848 44.302,73.356 44.302,83.008 47.604,83.008 47.604,79.198 52.43,79.198 52.43,73.102
VIN2_BYPASSEDE on Top Layer "Top Layer-No Net" (solid, remove dead copper, pour order 37): 178.378,70.602 178.378,79.492 179.394,80.508 179.394,83.556 176.092,83.556 174.06,85.588 174.06,93.396 171.266,93.396 171.266,82.982 174.568,79.746 174.568,70.602
GND on Top Layer "Top Layer-No Net" (solid, remove dead copper, pour order 50): 139.799,79.427 134.973,79.427 134.719,79.172 105.001,79.172 105.001,89.877 101.699,93.191 101.699,98.034 139.799,98.034
VIN1_BYPASSEDB on Top Layer "Top Layer-No Net" (solid, remove dead copper, pour order 44): 87.313,70.458 91.123,70.458 91.123,79.602 91.885,80.364 91.885,83.666 91.631,83.666 90.361,84.936 87.313,84.936 87.313,93.572 83.249,93.572 83.249,84.936 86.043,82.142 87.567,80.618 87.567,80.11
VIN2_BYPASSEDA on Top Layer "Top Layer-No Net" (solid, remove dead copper, pour order 33): 38.714,70.562 38.714,79.452 39.73,80.468 39.73,83.516 36.428,83.516 34.396,85.548 34.396,93.356 31.602,93.356 31.602,82.942 34.904,79.706 34.904,70.562
GND on Top Layer "Top Layer-No Net" (solid, remove dead copper, pour order 52): 174.66,79.349 169.834,79.349 169.58,79.094 139.862,79.094 139.862,89.799 136.56,93.113 136.56,97.956 174.66,97.956
VIN1_BYPASSEDE on Top Layer "Top Layer-No Net" (solid, remove dead copper, pour order 47): 192.094,70.536 195.904,70.536 195.904,79.68 196.666,80.442 196.666,83.744 196.412,83.744 195.142,85.014 192.094,85.014 192.094,93.65 188.03,93.65 188.03,85.014 190.824,82.22 192.348,80.696 192.348,80.188
VIN1_BYPASSEDC on Top Layer "Top Layer-No Net" (solid, remove dead copper, pour order 45): 122.244,70.409 126.054,70.409 126.054,79.553 126.816,80.315 126.816,83.617 126.562,83.617 125.292,84.887 122.244,84.887 122.244,93.523 118.18,93.523 118.18,84.887 120.974,82.093 122.498,80.569 122.498,80.061
VIN2_BYPASSEDB on Top Layer "Top Layer-No Net" (solid, remove dead copper, pour order 34): 73.597,70.524 73.597,79.414 74.613,80.43 74.613,83.478 71.311,83.478 69.279,85.51 69.279,93.318 66.485,93.318 66.485,82.904 69.787,79.668 69.787,70.524
VIN1_BYPASSEDA on Top Layer "Top Layer-No Net" (solid, remove dead copper, pour order 43): 52.43,70.496 56.24,70.496 56.24,79.64 57.002,80.402 57.002,83.704 56.748,83.704 55.478,84.974 52.43,84.974 52.43,93.61 48.366,93.61 48.366,84.974 51.16,82.18 52.684,80.656 52.684,80.148
GND on Bottom Layer "Top Layer-No Net 1" (solid, remove dead copper, pour order 30): 0.508,0.508 221.996,0.508 221.996,109.22 0.508,109.22 0.508,0.508
GND on Internal Plane 2 (split plane): 221.99,0.51 0.51,0.51 0.51,109.49 221.99,109.49
GND on Internal Plane 1 (split plane): 221.99,0.51 0.51,0.51 0.51,109.49 221.99,109.49

## Other copper
Top Layer:
  rectangle net GND: 31.856,97.917 209.626,99.238

## Silkscreen, mask and mechanical layers (free items; w line width, h text height)
Top Overlay:
  lines w0.203: 36,101 130,101 130,108 36,108 36,101
  lines w0.381: 31,31.73 31,34.27 ; 32.524,32.492 31,33 ; 32.524,33.508 31,33 ; 115.261,33 31,33 ; 126.739,33 211,33 ; 209.476,32.492 211,33 ; 209.476,33.508 211,33 ; 211,31.73 211,34.27 ; 211.73,35 214.27,35 ; 211.73,99 214.27,99 ; 212.492,36.524 213,35 ; 212.492,97.476 213,99 ; 213,61.896 213,35 ; 213,72.104 213,99 ; 213.508,36.524 213,35 ; 213.508,97.476 213,99
  text "BLUEsat Power Subsystem" at 37.5,105 h1.52
  text "V2 Prototype Board 2012" at 37.5,102.5 h1.52
  text "Cam Brown, Alexis Shaw, Mitch Wenke" at 75.565,102.514 h1.52
  text "3V3A" at 37.592,96.52 h1.52
  text "3V3B" at 55.118,96.52 h1.52
  text "5V0A" at 72.39,96.52 h1.52
  text "5V0B" at 89.916,96.52 h1.52
  text "9V1A" at 107.442,96.52 h1.52
  text "9V1B" at 124.968,96.52 h1.52
  text "13V6A" at 142.24,96.52 h1.52
  text "13V6B" at 160.02,96.52 h1.52
  text "VVARA" at 177.292,96.52 h1.52
  text "VVARB" at 194.818,96.52 h1.52
  text "18-24V" at 12.192,79.502 h1.52
  text "CTRL" at 13.462,68.072 h1.52
  text "GND" at 16.764,65.532 h1.52
  text "SCL" at 16.764,62.992 h1.52
  text "64 (mm)" at 213.914,62.15 h1.52 r90
  text "SDA" at 16.764,60.452 h1.52
  text "3V3" at 16.764,57.912 h1.52
  text "3V3_PWR" at 13.462,50.292 h1.52
  text "BUS" at 16.764,47.752 h1.52
  text "D2" at 111.76,42.672 h1.02
  text "EXT" at 16.764,42.164 h1.52
  text "1" at 180.594,41.91 h0.76
  text "1" at 142.748,41.148 h0.76
  text "D1" at 111.76,40.132 h1.02
  text "1" at 94.742,39.878 h0.76
  text "0" at 180.594,39.624 h0.76
  text "0" at 142.748,39.116 h0.76
  text "0" at 94.742,37.846 h0.76
  text "180 (mm)" at 115.515,32.086 h1.52
Mechanical 9:
  the board outline again, w0.1

## Text inside footprints (layer, text, board x,y; h text height)
P1: Top Overlay "+" at 188,11.25 h1.52 r180; Top Overlay "-" at 193,11.25 h1.52 r180
P2: Top Overlay "+" at 158,11.25 h1.52 r180; Top Overlay "-" at 163,11.25 h1.52 r180
P3: Top Overlay "+" at 128,11.25 h1.52 r180; Top Overlay "-" at 133,11.25 h1.52 r180
P4: Top Overlay "+" at 98,11.25 h1.52 r180; Top Overlay "-" at 103,11.25 h1.52 r180
P5: Top Overlay "+" at 203,11.25 h1.52 r180; Top Overlay "-" at 208,11.25 h1.52 r180
P6: Top Overlay "+" at 11.022,91.916 h1.52 r90; Top Overlay "-" at 11.022,86.916 h1.52 r90
P7: Top Overlay "+" at 173,11.25 h1.52 r180; Top Overlay "-" at 178,11.25 h1.52 r180
P8: Top Overlay "+" at 11.75,36.5 h1.52 r90; Top Overlay "-" at 11.75,31.5 h1.52 r90
P10: Top Overlay "+" at 143,11.25 h1.52 r180; Top Overlay "-" at 148,11.25 h1.52 r180
P11: Top Overlay "+" at 113,11.25 h1.52 r180; Top Overlay "-" at 118,11.25 h1.52 r180
P12: Top Overlay "+" at 68,11.25 h1.52 r180; Top Overlay "-" at 73,11.25 h1.52 r180
P14: Top Overlay "+" at 53,11.25 h1.52 r180; Top Overlay "-" at 58,11.25 h1.52 r180
P15: Top Overlay "+" at 83,11.25 h1.52 r180; Top Overlay "-" at 88,11.25 h1.52 r180
P16: Top Overlay "+" at 38,11.25 h1.52 r180; Top Overlay "-" at 43,11.25 h1.52 r180